# Altium PCB ACH512识别升级仪V1.2_20260608.PcbDoc (part 6 of 6)
Units mil, origin at the board's own origin, x right, y up, seen from the top; angles counter-clockwise.
Board outline 6141.73 x 5401.57 mil, 2 copper layers (Top Layer, Bottom Layer); 157 components, 111 nets, 548 pads, 222 vias.
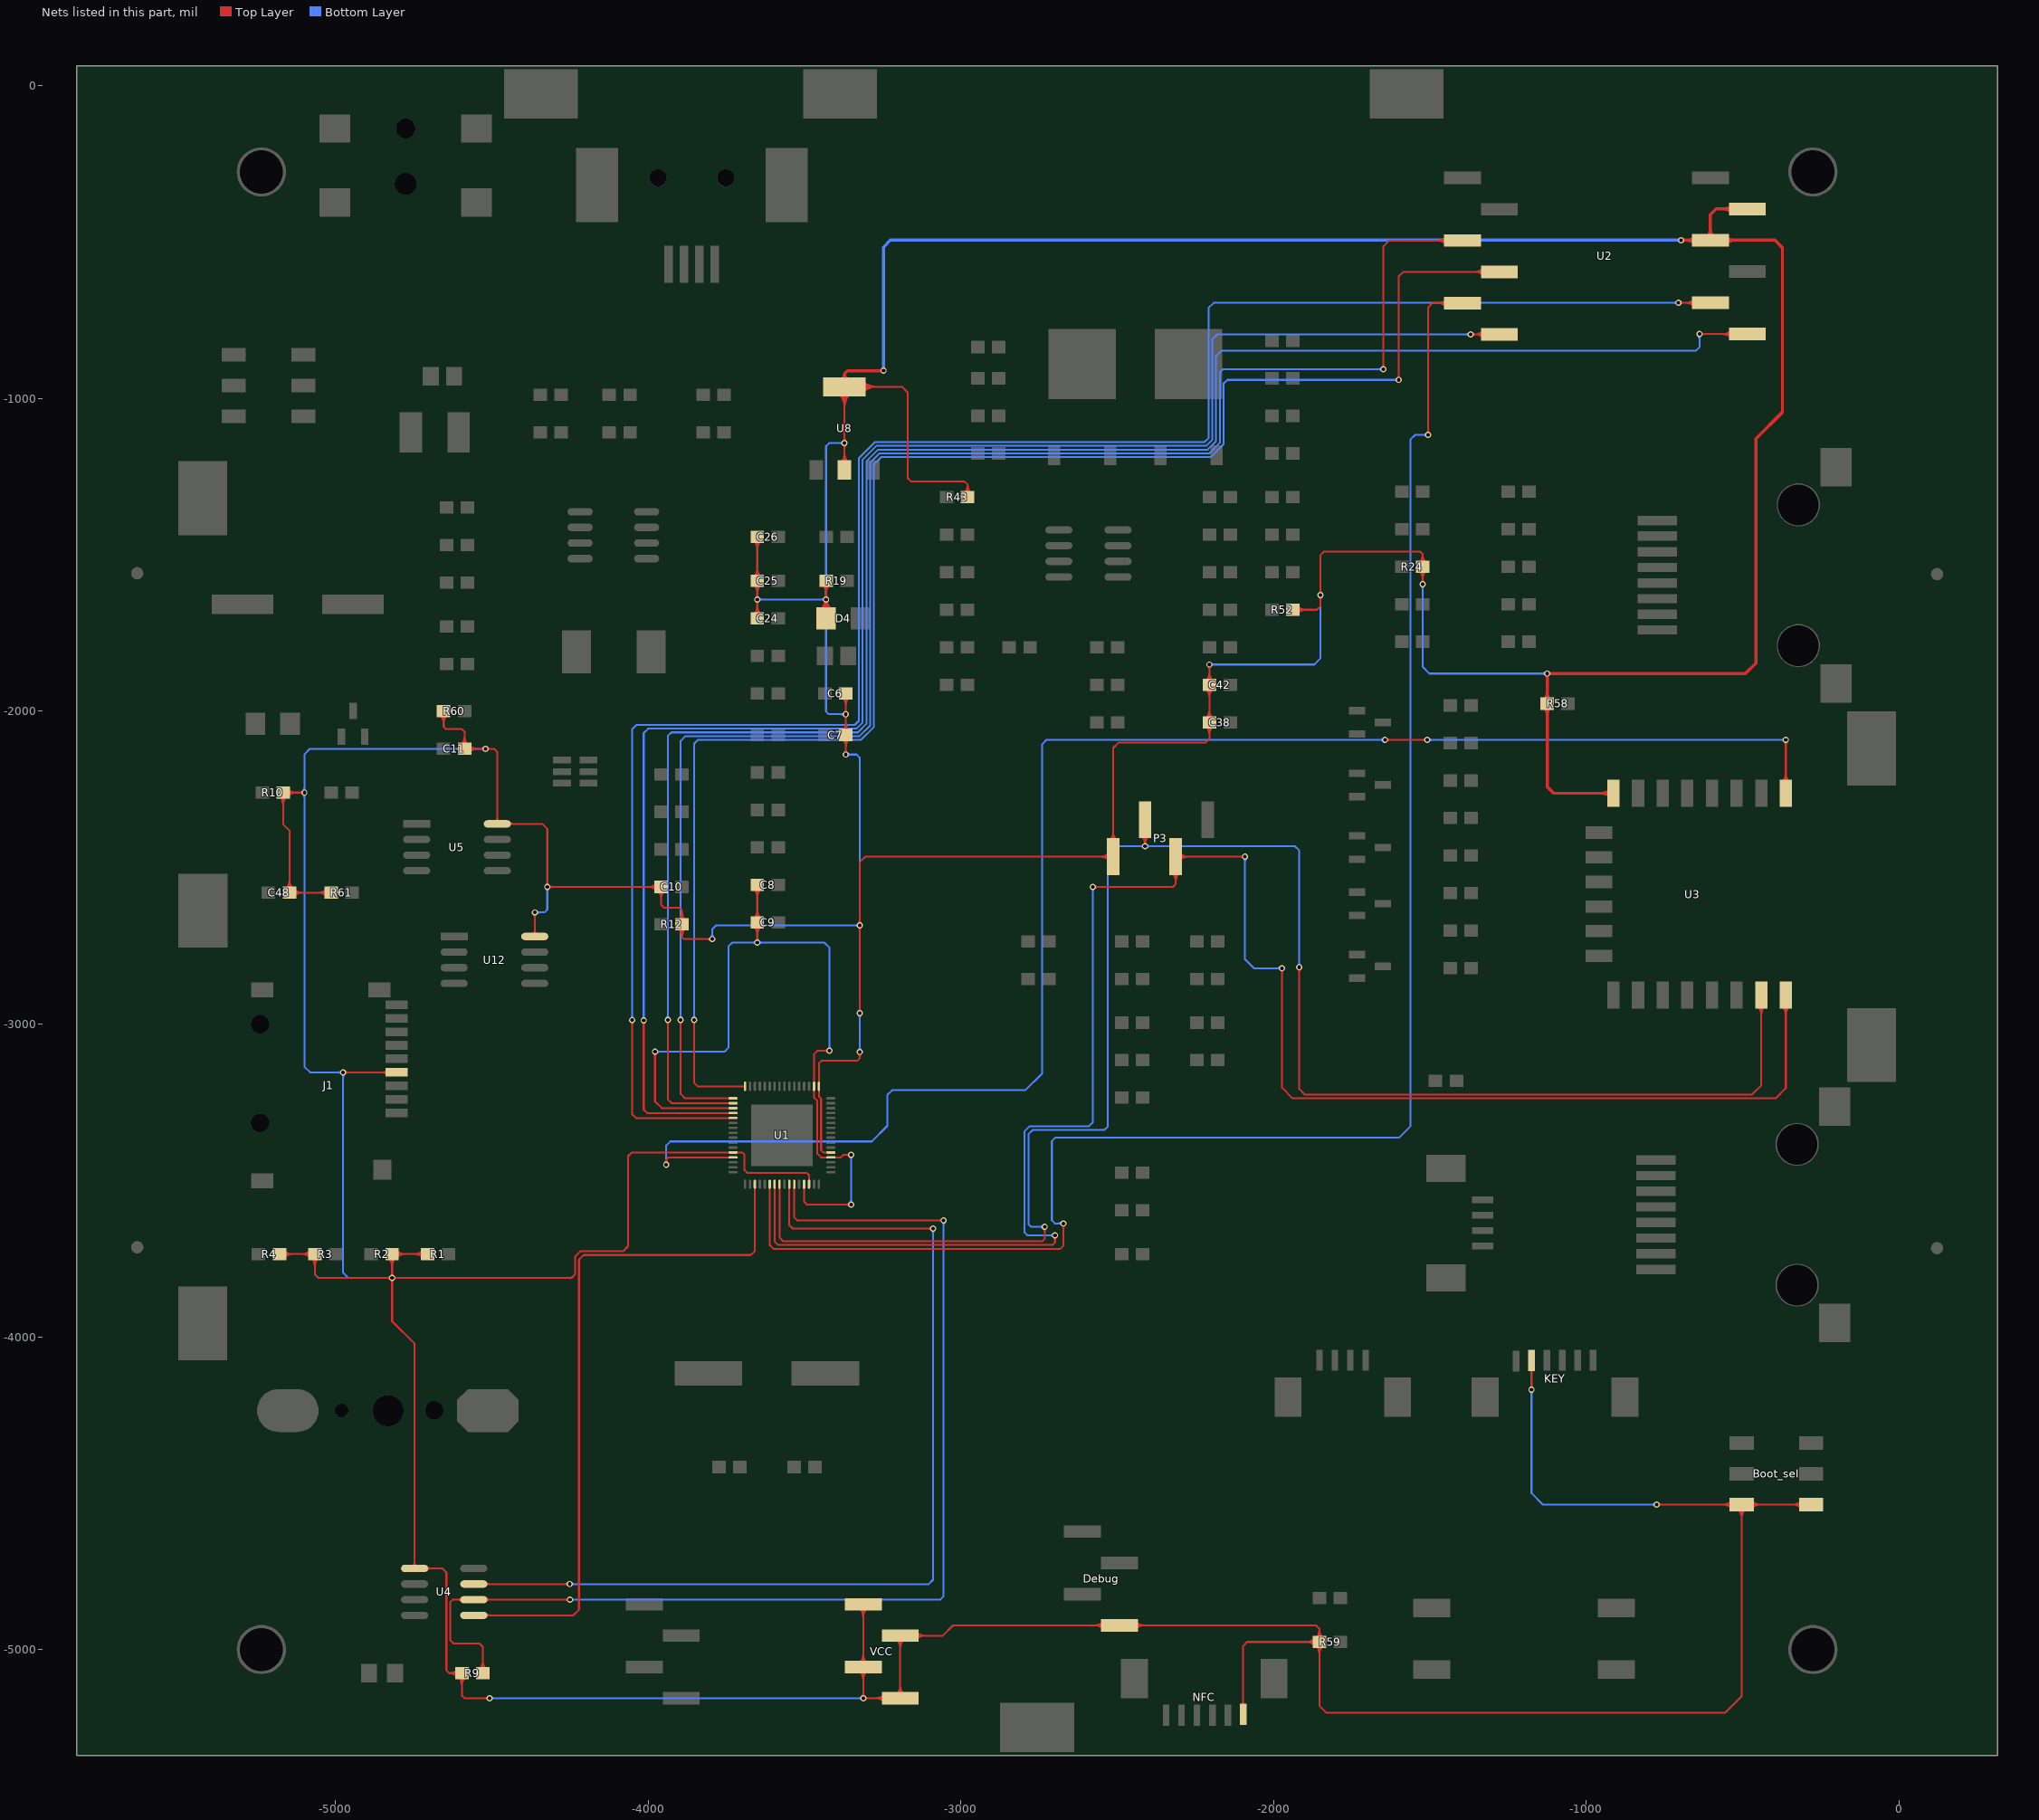
[diagram p6: the nets of this part, all layers, seen from the top]

## Via types
v1: diameter 19.68, hole 11.81, Top Layer to Bottom Layer, 222 vias

## Nets (pads, with @x,y where several pads share a name; then routed paths per layer and width w, separated by ;. In a path a pad name is that pad's centre, name@x,y a point inside that pad or via, vN(x,y) a via of type N, cw(c..) or ccw(c..) an arc to the next point about the centre after c; other vN are vias at no path point) (continued)
PRINT_UARTB_RX: P3.3 U1.23 U3.22 | length 6396.5
  Top Layer w6: U1.23@-3595.43,-3512.09 -3595.43,-3694.97 -3583.81,-3706.59 -2706.81,-3706.59 -2698.81,-3698.59 v1(-2698.81,-3675.59) ; v1@-2703.65,-3680.43 cw(c-2715.33,-3692.11) -2698.81,-3692.11 cw(c-2682.29,-3692.11) v1@-2693.97,-3680.43 ; v1(-2577.81,-2561.59) -2321.81,-2561.59 -2312.81,-2552.59 P3.3@-2312.81,-2465 v1(-2091.22,-2465) ; v1@-2572.97,-2566.43 cw(c-2561.29,-2578.11) -2561.29,-2561.59 cw(c-2561.29,-2545.07) v1@-2572.97,-2556.75 ; P3.3@-2324.89,-2516.05 cw(c-2354.04,-2545.21) -2312.81,-2545.21 cw(c-2271.58,-2545.21) P3.3@-2300.73,-2516.05 ; P3.3@-2320.64,-2511.81 cw(c-2339.56,-2530.72) -2312.81,-2530.72 cw(c-2286.06,-2530.72) P3.3@-2304.98,-2511.81 ; P3.3@-2304.98,-2472.83 cw(c-2286.06,-2491.75) -2286.06,-2465 cw(c-2286.06,-2438.25) P3.3@-2304.98,-2457.17 ; P3.3@-2300.73,-2477.08 cw(c-2271.58,-2506.23) -2271.58,-2465 cw(c-2271.58,-2423.77) P3.3@-2300.73,-2452.92 ; v1@-2096.06,-2469.84 ccw(c-2107.74,-2481.52) -2107.74,-2465 ccw(c-2107.74,-2448.48) v1@-2096.06,-2460.16 ; v1@-1977.65,-2826.43 cw(c-1989.33,-2838.11) -1972.81,-2838.11 cw(c-1956.29,-2838.11) v1@-1967.97,-2826.43 ; v1(-1972.81,-2821.59) -1972.81,-3203.59 -1938.81,-3237.59 -394.81,-3237.59 -362.05,-3204.83 U3.22@-362.05,-2907.87 ; U3.22@-373.84,-2943.29 cw(c-402.33,-2971.78) -362.05,-2971.78 cw(c-321.76,-2971.78) U3.22@-350.25,-2943.29 ; U3.22@-369.6,-2939.05 cw(c-387.84,-2957.29) -362.05,-2957.29 cw(c-336.25,-2957.29) U3.22@-354.49,-2939.05
  Bottom Layer w6: v1@-2703.65,-3680.43 ccw(c-2715.33,-3692.11) -2715.33,-3675.59 ccw(c-2715.33,-3659.07) v1@-2703.65,-3670.75 ; v1(-2698.81,-3675.59) -2786.81,-3675.59 -2795.81,-3666.59 -2795.81,-3342.59 -2779.81,-3326.59 -2589.81,-3326.59 -2577.81,-3314.59 v1(-2577.81,-2561.59) ; v1@-2582.65,-2566.43 cw(c-2594.33,-2578.11) -2577.81,-2578.11 cw(c-2561.29,-2578.11) v1@-2572.97,-2566.43 ; v1@-2096.06,-2469.84 cw(c-2107.74,-2481.52) -2091.22,-2481.52 cw(c-2074.7,-2481.52) v1@-2086.38,-2469.84 ; v1(-2091.22,-2465) -2091.22,-2793.18 -2062.81,-2821.59 v1(-1972.81,-2821.59) ; v1@-1977.65,-2826.43 ccw(c-1989.33,-2838.11) -1989.33,-2821.59 ccw(c-1989.33,-2805.07) v1@-1977.65,-2816.75
PRINT_UARTB_TX: P3.2 U1.24 U3.21 | length 6201.4
  Top Layer w6: U1.24@-3579.68,-3512.09 -3579.68,-3682.72 -3567.81,-3694.59 -2739.81,-3694.59 -2731.81,-3686.59 v1(-2731.81,-3648.59) ; v1@-2736.65,-3653.43 cw(c-2748.33,-3665.11) -2731.81,-3665.11 cw(c-2715.29,-3665.11) v1@-2726.97,-3653.43 ; P3.2@-2422.89,-2398.05 cw(c-2452.04,-2427.21) -2410.81,-2427.21 cw(c-2369.58,-2427.21) P3.2@-2398.73,-2398.05 ; P3.2@-2418.64,-2393.81 cw(c-2437.56,-2412.72) -2410.81,-2412.72 cw(c-2384.06,-2412.72) P3.2@-2402.98,-2393.81 ; v1@-2415.65,-2426.75 ccw(c-2427.33,-2415.07) -2410.81,-2415.07 ccw(c-2394.29,-2415.07) v1@-2405.97,-2426.75 ; v1(-2410.81,-2431.59) P3.2@-2410.81,-2347 ; v1@-1922.65,-2823.43 cw(c-1934.33,-2835.11) -1917.81,-2835.11 cw(c-1901.29,-2835.11) v1@-1912.97,-2823.43 ; v1(-1917.81,-2818.59) -1917.81,-3207.59 -1899.81,-3225.59 -470.81,-3225.59 -440.79,-3195.57 U3.21@-440.79,-2907.87 ; U3.21@-452.58,-2943.29 cw(c-481.07,-2971.78) -440.79,-2971.78 cw(c-400.51,-2971.78) U3.21@-428.99,-2943.29 ; U3.21@-448.34,-2939.05 cw(c-466.58,-2957.29) -440.79,-2957.29 cw(c-414.99,-2957.29) U3.21@-433.23,-2939.05
  Bottom Layer w6: v1@-2736.65,-3653.43 ccw(c-2748.33,-3665.11) -2748.33,-3648.59 ccw(c-2748.33,-3632.07) v1@-2736.65,-3643.75 ; v1(-2731.81,-3648.59) -2774.81,-3648.59 -2783.81,-3639.59 -2783.81,-3352.59 -2769.81,-3338.59 -2540.81,-3338.59 -2529.81,-3327.59 -2529.81,-2444.59 -2516.81,-2431.59 v1(-2410.81,-2431.59) -1931.81,-2431.59 -1917.81,-2445.59 v1(-1917.81,-2818.59) ; v1@-2415.65,-2436.43 ccw(c-2427.33,-2448.11) -2427.33,-2431.59 ccw(c-2427.33,-2415.07) v1@-2415.65,-2426.75 ; v1@-2405.97,-2436.43 cw(c-2394.29,-2448.11) -2394.29,-2431.59 cw(c-2394.29,-2415.07) v1@-2405.97,-2426.75 ; v1@-1922.65,-2813.75 ccw(c-1934.33,-2802.07) -1917.81,-2802.07 ccw(c-1901.29,-2802.07) v1@-1912.97,-2813.75
RTC_CE: U1.19 U4.5 | length 2283.6
  Top Layer w6: U4.5@-4557.32,-4890.59 -4238.81,-4890.59 -4220.81,-4872.59 -4220.81,-3753.59 -4205.81,-3738.59 -3671.81,-3738.59 -3658.42,-3725.2 U1.19@-3658.42,-3512.09 ; U4.5@-4519.6,-4896.82 cw(c-4504.55,-4911.86) -4504.55,-4890.59 cw(c-4504.55,-4869.32) U4.5@-4519.6,-4884.36
RTC_IO: R9.1 U1.27 U4.6 | length 3969.3
  Top Layer w6: U4.6@-4595.05,-4846.82 ccw(c-4610.09,-4861.86) -4610.09,-4840.59 ccw(c-4610.09,-4819.32) U4.6@-4595.05,-4834.36 ; R9.1@-4540.14,-5063.79 ccw(c-4568.63,-5035.31) -4528.35,-5035.31 ccw(c-4488.06,-5035.31) R9.1@-4516.55,-5063.79 ; R9.1@-4535.9,-5068.03 ccw(c-4554.14,-5049.79) -4528.35,-5049.79 ccw(c-4502.55,-5049.79) R9.1@-4520.79,-5068.03 ; R9.1@-4528.35,-5075.59 -4528.35,-4991.05 -4538.81,-4980.59 -4621.81,-4980.59 -4632.81,-4969.59 -4632.81,-4848.59 -4624.81,-4840.59 U4.6@-4557.32,-4840.59 v1(-4249.81,-4840.59) ; U4.6@-4519.6,-4846.82 cw(c-4504.55,-4861.86) -4504.55,-4840.59 cw(c-4504.55,-4819.32) U4.6@-4519.6,-4834.36 ; v1@-4254.65,-4845.43 ccw(c-4266.33,-4857.11) -4266.33,-4840.59 ccw(c-4266.33,-4824.07) v1@-4254.65,-4835.75 ; U1.27@-3532.44,-3512.09 -3532.44,-3618.96 -3523.81,-3627.59 v1(-3054.81,-3627.59) ; v1@-3059.65,-3632.43 ccw(c-3071.33,-3644.11) -3071.33,-3627.59 ccw(c-3071.33,-3611.07) v1@-3059.65,-3622.75
  Bottom Layer w6: v1(-4249.81,-4840.59) -3065.81,-4840.59 -3054.81,-4829.59 v1(-3054.81,-3627.59) ; v1@-4244.97,-4845.43 cw(c-4233.29,-4857.11) -4233.29,-4840.59 cw(c-4233.29,-4824.07) v1@-4244.97,-4835.75 ; v1@-3059.65,-3632.43 cw(c-3071.33,-3644.11) -3054.81,-3644.11 cw(c-3038.29,-3644.11) v1@-3049.97,-3632.43
RTC_SCLK: U1.26 U4.7 | length 3329
  Top Layer w6: U4.7@-4557.32,-4790.59 v1(-4250.81,-4790.59) ; U4.7@-4519.6,-4796.82 cw(c-4504.55,-4811.86) -4504.55,-4790.59 cw(c-4504.55,-4769.32) U4.7@-4519.6,-4784.36 ; v1@-4255.65,-4795.43 ccw(c-4267.33,-4807.11) -4267.33,-4790.59 ccw(c-4267.33,-4774.07) v1@-4255.65,-4785.75 ; U1.26@-3548.19,-3512.09 -3548.19,-3643.21 -3537.31,-3654.09 v1(-3088.81,-3654.09) ; v1@-3093.65,-3658.93 ccw(c-3105.33,-3670.61) -3105.33,-3654.09 ccw(c-3105.33,-3637.57) v1@-3093.65,-3649.25
  Bottom Layer w6: v1(-4250.81,-4790.59) -3102.81,-4790.59 -3088.81,-4776.59 v1(-3088.81,-3654.09) ; v1@-4245.97,-4795.43 cw(c-4234.29,-4807.11) -4234.29,-4790.59 cw(c-4234.29,-4774.07) v1@-4245.97,-4785.75 ; v1@-3093.65,-3658.93 cw(c-3105.33,-3670.61) -3088.81,-3670.61 cw(c-3072.29,-3670.61) v1@-3083.97,-3658.93
VCC: Boot_sel.1 C6.2 C7.2 C10.2 C11.1 C24.1 C25.1 C26.1 C38.2 C42.2 C48.2 D4.1 Debug.1 J1.4 KEY.5 NFC.6 P3.1 R1.2 R2.2 R3.2 R4.2 R9.2 R10.2 R12.1 R19.2 R24.2 R43.2 R52.2 R58.2 R59.1 R60.2 R61.1 U1.12 U1.30 U1.37 U1.49 U2.8 U2.9 U3.8 U4.1 U5.8 U8.2 U8.4 U12.8 VCC.1 VCC.2 VCC.3 VCC.4 | length 40039.5
  Top Layer w6: R4.2@-5178.35,-3735.59 R3.2@-5065.27,-3735.59 -5065.27,-3800.13 -5053.81,-3811.59 v1(-4818.35,-3811.59) ; R10.2@-5178.33,-2271.8 cw(c-5206.82,-2300.28) -5166.54,-2300.28 cw(c-5126.25,-2300.28) R10.2@-5154.74,-2271.8 ; R10.2@-5174.09,-2267.56 cw(c-5192.33,-2285.8) -5166.54,-2285.8 cw(c-5140.74,-2285.8) R10.2@-5158.98,-2267.56 ; R4.2@-5168.82,-3743.15 cw(c-5150.58,-3761.39) -5150.58,-3735.59 cw(c-5150.58,-3709.79) R4.2@-5168.82,-3728.03 ; R4.2@-5164.58,-3747.39 cw(c-5136.1,-3775.87) -5136.1,-3735.59 cw(c-5136.1,-3695.31) R4.2@-5164.58,-3723.79 ; C48.2@-5158.33,-2568.2 ccw(c-5186.82,-2539.72) -5146.54,-2539.72 ccw(c-5106.25,-2539.72) C48.2@-5134.74,-2568.2 ; R10.2@-5157.01,-2267.56 cw(c-5138.77,-2285.8) -5138.77,-2260 cw(c-5138.77,-2234.2) R10.2@-5157.01,-2252.44 ; C48.2@-5154.09,-2572.44 ccw(c-5172.33,-2554.2) -5146.54,-2554.2 ccw(c-5120.74,-2554.2) C48.2@-5138.98,-2572.44 ; R10.2@-5152.77,-2271.8 cw(c-5124.29,-2300.28) -5124.29,-2260 cw(c-5124.29,-2219.72) R10.2@-5152.77,-2248.2 ; C48.2@-5137.01,-2587.56 cw(c-5118.77,-2605.8) -5118.77,-2580 cw(c-5118.77,-2554.2) C48.2@-5137.01,-2572.44 ; C48.2@-5132.77,-2591.8 cw(c-5104.29,-2620.28) -5104.29,-2580 cw(c-5104.29,-2539.72) C48.2@-5132.77,-2568.2 ; v1@-5103.65,-2264.84 ccw(c-5115.33,-2276.52) -5115.33,-2260 ccw(c-5115.33,-2243.48) v1@-5103.65,-2255.16 ; v1(-5098.81,-2260) R10.2@-5166.54,-2260 -5166.54,-2361.46 -5146.54,-2381.46 C48.2@-5146.54,-2580 R61.1@-5013.46,-2580 ; R3.2@-5079.04,-3747.39 ccw(c-5107.52,-3775.87) -5107.52,-3735.59 ccw(c-5107.52,-3695.31) R3.2@-5079.04,-3723.79 ; R3.2@-5077.07,-3747.39 cw(c-5105.56,-3775.87) -5065.27,-3775.87 cw(c-5024.99,-3775.87) R3.2@-5053.48,-3747.39 ; R3.2@-5074.8,-3743.15 ccw(c-5093.04,-3761.39) -5093.04,-3735.59 ccw(c-5093.04,-3709.79) R3.2@-5074.8,-3728.03 ; R3.2@-5072.83,-3743.15 cw(c-5091.07,-3761.39) -5065.27,-3761.39 cw(c-5039.48,-3761.39) R3.2@-5057.72,-3743.15 ; R61.1@-5027.23,-2591.8 ccw(c-5055.71,-2620.28) -5055.71,-2580 ccw(c-5055.71,-2539.72) R61.1@-5027.23,-2568.2 ; R61.1@-5022.99,-2587.56 ccw(c-5041.23,-2605.8) -5041.23,-2580 ccw(c-5041.23,-2554.2) R61.1@-5022.99,-2572.44 ; v1(-4974.73,-3154.67) J1.4@-4804.24,-3154.67 ; v1@-4969.89,-3159.51 cw(c-4958.21,-3171.19) -4958.21,-3154.67 cw(c-4958.21,-3138.15) v1@-4969.89,-3149.83 ; J1.4@-4833.52,-3162.29 ccw(c-4851.92,-3180.7) -4851.92,-3154.67 ccw(c-4851.92,-3128.64) J1.4@-4833.52,-3147.05 ; R2.2@-4830.14,-3747.39 cw(c-4858.63,-3775.87) -4818.35,-3775.87 cw(c-4778.06,-3775.87) R2.2@-4806.55,-3747.39 ; R2.2@-4825.9,-3743.15 cw(c-4844.14,-3761.39) -4818.35,-3761.39 cw(c-4792.55,-3761.39) R2.2@-4810.79,-3743.15 ; R2.2@-4808.82,-3743.15 cw(c-4790.58,-3761.39) -4790.58,-3735.59 cw(c-4790.58,-3709.79) R2.2@-4808.82,-3728.03 ; R2.2@-4804.58,-3747.39 cw(c-4776.1,-3775.87) -4776.1,-3735.59 cw(c-4776.1,-3695.31) R2.2@-4804.58,-3723.79 ; U4.1@-4752.53,-4734.36 ccw(c-4767.57,-4719.32) -4746.3,-4719.32 ccw(c-4725.03,-4719.32) U4.1@-4740.07,-4734.36 ; R1.2@-4719.04,-3747.39 ccw(c-4747.52,-3775.87) -4747.52,-3735.59 ccw(c-4747.52,-3695.31) R1.2@-4719.04,-3723.79 ; R1.2@-4714.8,-3743.15 ccw(c-4733.04,-3761.39) -4733.04,-3735.59 ccw(c-4733.04,-3709.79) R1.2@-4714.8,-3728.03 ; U4.1@-4708.57,-4746.82 cw(c-4693.53,-4761.86) -4693.53,-4740.59 cw(c-4693.53,-4719.32) U4.1@-4708.57,-4734.36 ; R1.2@-4705.27,-3735.59 R2.2@-4818.35,-3735.59 v1(-4818.35,-3811.59) ; R60.2@-4665.26,-2011.8 cw(c-4693.75,-2040.28) -4653.46,-2040.28 cw(c-4613.18,-2040.28) R60.2@-4641.67,-2011.8 ; R60.2@-4661.02,-2007.56 cw(c-4679.26,-2025.8) -4653.46,-2025.8 cw(c-4627.67,-2025.8) R60.2@-4645.91,-2007.56 ; R60.2@-4653.46,-2000 -4653.46,-2049.54 -4646,-2057 -4595,-2057 -4586.54,-2065.46 C11.1@-4586.54,-2120 v1(-4519.35,-2120) -4492,-2120 -4482.13,-2129.87 U5.8@-4482.13,-2360 -4338,-2360 -4322,-2376 v1(-4322,-2561.59) C10.2@-3958.27,-2561.59 -3958.27,-2619.13 -3948.81,-2628.59 -3899.81,-2628.59 -3891.35,-2637.05 R12.1@-3891.35,-2681.59 -3891.35,-2723.05 -3885.81,-2728.59 v1(-3794.81,-2728.59) ; R9.2@-4609.4,-5087.01 ccw(c-4635.81,-5111.82) -4635.81,-5075.59 ; R9.2@-4609.4,-5064.17 cw(c-4635.81,-5039.36) -4635.81,-5075.59 ; R9.2@-4607.07,-5087.39 cw(c-4635.56,-5115.87) -4595.27,-5115.87 cw(c-4554.99,-5115.87) R9.2@-4583.48,-5087.39 ; R9.2@-4605.03,-5082.91 ccw(c-4621.94,-5098.79) -4621.94,-5075.59 ccw(c-4621.94,-5052.39) R9.2@-4605.03,-5068.27 ; R9.2@-4602.83,-5083.15 cw(c-4621.07,-5101.39) -4595.27,-5101.39 cw(c-4569.48,-5101.39) R9.2@-4587.72,-5083.15 ; C11.1@-4598.33,-2108.2 ccw(c-4626.82,-2079.72) -4586.54,-2079.72 ccw(c-4546.25,-2079.72) C11.1@-4574.74,-2108.2 ; C11.1@-4594.09,-2112.44 ccw(c-4612.33,-2094.2) -4586.54,-2094.2 ccw(c-4560.74,-2094.2) C11.1@-4578.98,-2112.44 ; C11.1@-4577.01,-2127.56 cw(c-4558.77,-2145.8) -4558.77,-2120 cw(c-4558.77,-2094.2) C11.1@-4577.01,-2112.44 ; C11.1@-4572.77,-2131.8 cw(c-4544.29,-2160.28) -4544.29,-2120 cw(c-4544.29,-2079.72) C11.1@-4572.77,-2108.2 ; v1@-4524.18,-2124.84 ccw(c-4535.86,-2136.52) -4535.86,-2120 ccw(c-4535.86,-2103.48) v1@-4524.18,-2115.16 ; v1@-4514.51,-2124.84 cw(c-4502.83,-2136.52) -4502.83,-2120 cw(c-4502.83,-2103.48) v1@-4514.51,-2115.16 ; v1@-4511.65,-5160.43 ccw(c-4523.33,-5172.11) -4523.33,-5155.59 ccw(c-4523.33,-5139.07) v1@-4511.65,-5150.75 ; v1(-4506.81,-5155.59) -4586.81,-5155.59 -4595.27,-5147.13 R9.2@-4595.27,-5075.59 -4635.81,-5075.59 ; U5.8@-4488.36,-2353.77 ccw(c-4503.4,-2338.73) -4482.13,-2338.73 ccw(c-4460.85,-2338.73) U5.8@-4475.9,-2353.77 ; U5.8@-4444.4,-2366.23 cw(c-4429.36,-2381.27) -4429.36,-2360 cw(c-4429.36,-2338.73) U5.8@-4444.4,-2353.77 ; U12.8@-4368.36,-2713.77 ccw(c-4383.4,-2698.73) -4362.13,-2698.73 ccw(c-4340.85,-2698.73) U12.8@-4355.9,-2713.77 ; v1@-4366.96,-2647.96 cw(c-4378.65,-2659.65) -4362.13,-2659.65 cw(c-4345.61,-2659.65) v1@-4357.29,-2647.96 ; U12.8@-4362.13,-2720 v1(-4362.13,-2643.13) ; v1@-4326.84,-2556.75 ccw(c-4338.52,-2545.07) -4322,-2545.07 ccw(c-4305.48,-2545.07) -4317.16,-2556.75 ccw(c-4305.48,-2545.07) -4305.48,-2561.59 ccw(c-4305.48,-2578.11) v1@-4317.16,-2566.43 ; C10.2@-3972.04,-2573.39 ccw(c-4000.52,-2601.87) -4000.52,-2561.59 ccw(c-4000.52,-2521.31) C10.2@-3972.04,-2549.79 ; C10.2@-3970.07,-2573.39 cw(c-3998.56,-2601.87) -3958.27,-2601.87 cw(c-3917.99,-2601.87) C10.2@-3946.48,-2573.39 ; C10.2@-3967.8,-2569.15 ccw(c-3986.04,-2587.39) -3986.04,-2561.59 ccw(c-3986.04,-2535.79) C10.2@-3967.8,-2554.03 ; C10.2@-3965.83,-2569.15 cw(c-3984.07,-2587.39) -3958.27,-2587.39 cw(c-3932.48,-2587.39) C10.2@-3950.72,-2569.15 ; R12.1@-3903.14,-2693.39 cw(c-3931.63,-2721.87) -3891.35,-2721.87 cw(c-3851.06,-2721.87) R12.1@-3879.55,-2693.39 ; R12.1@-3903.14,-2669.79 ccw(c-3931.63,-2641.31) -3891.35,-2641.31 ccw(c-3851.06,-2641.31) R12.1@-3879.55,-2669.79 ; R12.1@-3898.9,-2689.15 cw(c-3917.14,-2707.39) -3891.35,-2707.39 cw(c-3865.55,-2707.39) R12.1@-3883.79,-2689.15 ; R12.1@-3898.9,-2674.03 ccw(c-3917.14,-2655.79) -3891.35,-2655.79 ccw(c-3865.55,-2655.79) R12.1@-3883.79,-2674.03 ; v1@-3799.65,-2733.43 ccw(c-3811.33,-2745.11) -3811.33,-2728.59 ccw(c-3811.33,-2712.07) v1@-3799.65,-2723.75 ; C24.1@-3662.54,-1690.79 ccw(c-3691.02,-1662.31) -3650.74,-1662.31 ccw(c-3610.46,-1662.31) C24.1@-3638.94,-1690.79 ; C25.1@-3662.54,-1594.39 cw(c-3691.02,-1622.87) -3650.74,-1622.87 cw(c-3610.46,-1622.87) C25.1@-3638.94,-1594.39 ; C25.1@-3662.54,-1570.79 ccw(c-3691.02,-1542.31) -3650.74,-1542.31 ccw(c-3610.46,-1542.31) C25.1@-3638.94,-1570.79 ; C26.1@-3662.54,-1454.39 cw(c-3691.02,-1482.87) -3650.74,-1482.87 cw(c-3610.46,-1482.87) C26.1@-3638.94,-1454.39 ; C24.1@-3658.29,-1695.03 ccw(c-3676.53,-1676.79) -3650.74,-1676.79 ccw(c-3624.94,-1676.79) C24.1@-3643.18,-1695.03 ; C25.1@-3658.29,-1590.15 cw(c-3676.53,-1608.39) -3650.74,-1608.39 cw(c-3624.94,-1608.39) C25.1@-3643.18,-1590.15 ; C25.1@-3658.29,-1575.03 ccw(c-3676.53,-1556.79) -3650.74,-1556.79 ccw(c-3624.94,-1556.79) C25.1@-3643.18,-1575.03 ; C26.1@-3658.29,-1450.15 cw(c-3676.53,-1468.39) -3650.74,-1468.39 cw(c-3624.94,-1468.39) C26.1@-3643.18,-1450.15 ; v1@-3655.58,-1647.43 cw(c-3667.26,-1659.11) -3650.74,-1659.11 cw(c-3634.22,-1659.11) v1@-3645.9,-1647.43 ; v1@-3655.58,-1637.75 ccw(c-3667.26,-1626.07) -3650.74,-1626.07 ccw(c-3634.22,-1626.07) v1@-3645.9,-1637.75 ; C24.1@-3650.74,-1702.59 v1(-3650.74,-1642.59) C25.1@-3650.74,-1582.59 C26.1@-3650.74,-1442.59 ; U1.30@-3485.2,-3512.09 -3485.2,-3483.2 -3492.81,-3475.59 -3682.81,-3475.59 -3691.81,-3466.59 -3691.81,-3417.59 -3698.69,-3410.71 U1.12@-3728.31,-3410.71 -4051.93,-3410.71 -4063.81,-3422.59 -4063.81,-3710.59 -4079.81,-3726.59 -4216.81,-3726.59 -4232.81,-3742.59 -4232.81,-3799.59 -4244.81,-3811.59 v1(-4818.35,-3811.59) ; D4.1@-3450.89,-1678.5 ccw(c-3499.53,-1629.86) -3430.74,-1629.86 ccw(c-3361.94,-1629.86) D4.1@-3410.59,-1678.5 ; D4.1@-3446.65,-1682.75 ccw(c-3485.05,-1644.34) -3430.74,-1644.34 ccw(c-3376.43,-1644.34) D4.1@-3414.83,-1682.75 ; R19.2@-3442.54,-1594.39 cw(c-3471.02,-1622.87) -3430.74,-1622.87 cw(c-3390.46,-1622.87) R19.2@-3418.94,-1594.39 ; D4.1@-3442.4,-1686.99 ccw(c-3470.56,-1658.83) -3430.74,-1658.83 ccw(c-3390.91,-1658.83) D4.1@-3419.07,-1686.99 ; R19.2@-3438.29,-1590.15 cw(c-3456.54,-1608.39) -3430.74,-1608.39 cw(c-3404.94,-1608.39) R19.2@-3423.18,-1590.15 ; v1@-3435.58,-1647.43 cw(c-3447.26,-1659.11) -3430.74,-1659.11 cw(c-3414.22,-1659.11) v1@-3425.9,-1647.43 ; v1@-3435.58,-1637.75 ccw(c-3447.26,-1626.07) -3430.74,-1626.07 ccw(c-3414.22,-1626.07) v1@-3425.9,-1637.75 ; D4.1@-3430.74,-1702.59 R19.2@-3430.74,-1582.59 ; U1.37@-3415.31,-3410.71 -3439.69,-3410.71 -3446.81,-3403.59 -3446.81,-3238.59 -3453.81,-3231.59 -3453.81,-3199.2 U1.49@-3453.7,-3199.09 -3453.7,-3125.48 -3445.81,-3117.59 -3330.81,-3117.59 -3323.22,-3110 v1(-3323.22,-3089.18) ; U8.4@-3391.26,-982.17 cw(c-3438.23,-1029.14) -3371.81,-1029.14 cw(c-3305.39,-1029.14) U8.4@-3352.36,-982.17 ; U8.4@-3387.02,-977.93 cw(c-3423.74,-1014.65) -3371.81,-1014.65 cw(c-3319.88,-1014.65) U8.4@-3356.6,-977.93 ; U8.2@-3385,-1206.42 ccw(c-3416.84,-1174.57) -3371.81,-1174.57 ccw(c-3326.78,-1174.57) U8.2@-3358.62,-1206.42 ; U8.4@-3382.78,-973.68 cw(c-3409.26,-1000.16) -3371.81,-1000.16 cw(c-3334.36,-1000.16) U8.4@-3360.84,-973.68 ; U8.2@-3380.76,-1210.66 ccw(c-3402.36,-1189.06) -3371.81,-1189.06 ccw(c-3341.26,-1189.06) U8.2@-3362.86,-1210.66 ; C7.2@-3379.54,-2087.39 cw(c-3408.03,-2115.87) -3367.75,-2115.87 cw(c-3327.46,-2115.87) C7.2@-3355.95,-2087.39 ; C7.2@-3379.54,-2063.79 ccw(c-3408.03,-2035.31) -3367.75,-2035.31 ccw(c-3327.46,-2035.31) C7.2@-3355.95,-2063.79 ; C6.2@-3379.54,-1954.39 cw(c-3408.03,-1982.87) -3367.75,-1982.87 cw(c-3327.46,-1982.87) C6.2@-3355.95,-1954.39 ; v1@-3376.65,-1147.43 cw(c-3388.33,-1159.11) -3371.81,-1159.11 cw(c-3355.29,-1159.11) v1@-3366.97,-1147.43 ; v1@-3376.65,-1137.75 ccw(c-3388.33,-1126.07) -3371.81,-1126.07 ccw(c-3355.29,-1126.07) v1@-3366.97,-1137.75 ; C7.2@-3375.3,-2083.15 cw(c-3393.54,-2101.39) -3367.75,-2101.39 cw(c-3341.95,-2101.39) C7.2@-3360.19,-2083.15 ; C7.2@-3375.3,-2068.03 ccw(c-3393.54,-2049.79) -3367.75,-2049.79 ccw(c-3341.95,-2049.79) C7.2@-3360.19,-2068.03 ; C6.2@-3375.3,-1950.15 cw(c-3393.54,-1968.39) -3367.75,-1968.39 cw(c-3341.95,-1968.39) C6.2@-3360.19,-1950.15 ; v1@-3372.58,-2133.69 ccw(c-3384.26,-2122.01) -3367.75,-2122.01 ccw(c-3351.23,-2122.01) v1@-3362.91,-2133.69 ; v1@-3372.58,-2014.43 cw(c-3384.26,-2026.11) -3367.75,-2026.11 cw(c-3351.23,-2026.11) v1@-3362.91,-2014.43 ; v1@-3372.58,-2004.75 ccw(c-3384.26,-1993.07) -3367.75,-1993.07 ccw(c-3351.23,-1993.07) v1@-3362.91,-2004.75 ; U8.2@-3371.81,-1228.46 v1(-3371.81,-1142.59) U8.4@-3371.81,-962.72 -3187.68,-962.72 -3169.81,-980.59 -3169.81,-1254.59 -3158.81,-1265.59 -2987.81,-1265.59 -2978.35,-1275.05 R43.2@-2978.35,-1315.59 ; v1(-3367.75,-2138.53) C7.2@-3367.75,-2075.59 v1(-3367.75,-2009.59) C6.2@-3367.75,-1942.59 ; v1@-3328.06,-3094.02 cw(c-3339.74,-3105.7) -3323.22,-3105.7 cw(c-3306.7,-3105.7) v1@-3318.38,-3094.02 ; v1@-3328.06,-2960.16 ccw(c-3339.74,-2948.48) -3323.22,-2948.48 ccw(c-3306.7,-2948.48) v1@-3318.38,-2960.16 ; v1@-3328.06,-2689.43 cw(c-3339.74,-2701.11) -3323.22,-2701.11 cw(c-3306.7,-2701.11) v1@-3318.38,-2689.43 ; v1@-3328.06,-2679.75 ccw(c-3339.74,-2668.07) -3323.22,-2668.07 ccw(c-3306.7,-2668.07) v1@-3318.38,-2679.75 ; VCC.3@-3323.89,-5067.67 cw(c-3353.04,-5096.82) -3311.81,-5096.82 cw(c-3270.58,-5096.82) VCC.3@-3299.73,-5067.67 ; VCC.3@-3323.89,-5043.51 ccw(c-3353.04,-5014.36) -3311.81,-5014.36 ccw(c-3270.58,-5014.36) VCC.3@-3299.73,-5043.51 ; VCC.1@-3323.89,-4867.67 cw(c-3353.04,-4896.82) -3311.81,-4896.82 cw(c-3270.58,-4896.82) VCC.1@-3299.73,-4867.67 ; U8.4@-3323.44,-973.68 cw(c-3296.96,-1000.16) -3296.96,-962.72 cw(c-3296.96,-925.27) U8.4@-3323.44,-951.75 ; v1(-3323.22,-2965) v1(-3323.22,-2684.59) -3323.22,-2482.41 -3305.81,-2465 P3.1@-2512.81,-2465 -2512.81,-2117.59 -2494.81,-2099.59 -2216.81,-2099.59 -2205.27,-2088.05 C38.2@-2205.27,-2035.59 C42.2@-2205.27,-1915.59 v1(-2205.27,-1850.59) ; VCC.3@-3319.64,-5063.42 cw(c-3338.56,-5082.34) -3311.81,-5082.34 cw(c-3285.06,-5082.34) VCC.3@-3303.98,-5063.42 ; VCC.3@-3319.64,-5047.76 ccw(c-3338.56,-5028.84) -3311.81,-5028.84 ccw(c-3285.06,-5028.84) VCC.3@-3303.98,-5047.76 ; VCC.1@-3319.64,-4863.42 cw(c-3338.56,-4882.34) -3311.81,-4882.34 cw(c-3285.06,-4882.34) VCC.1@-3303.98,-4863.42 ; U8.4@-3319.2,-977.93 cw(c-3282.47,-1014.65) -3282.47,-962.72 cw(c-3282.47,-910.78) U8.4@-3319.2,-947.5 ; v1@-3316.65,-5150.75 ccw(c-3328.33,-5139.07) -3311.81,-5139.07 ccw(c-3295.29,-5139.07) -3306.97,-5150.75 ccw(c-3295.29,-5139.07) -3295.29,-5155.59 ccw(c-3295.29,-5172.11) v1@-3306.97,-5160.43 ; U8.4@-3314.95,-982.17 cw(c-3267.99,-1029.14) -3267.99,-962.72 cw(c-3267.99,-896.3) U8.4@-3314.95,-943.26 ; VCC.1@-3311.81,-4855.59 VCC.3@-3311.81,-5055.59 v1(-3311.81,-5155.59) VCC.4@-3193.7,-5155.59 VCC.2@-3193.7,-4955.59 -3057.81,-4955.59 -3024.94,-4922.72 Debug.1@-2492.81,-4922.72 -1864.28,-4922.72 -1853.27,-4933.73 R59.1@-1853.27,-4975.59 ; VCC.4@-3244.75,-5167.67 ccw(c-3273.91,-5196.82) -3273.91,-5155.59 ccw(c-3273.91,-5114.36) VCC.4@-3244.75,-5143.51 ; VCC.4@-3240.51,-5163.42 ccw(c-3259.42,-5182.34) -3259.42,-5155.59 ccw(c-3259.42,-5128.84) VCC.4@-3240.51,-5147.76 ; VCC.4@-3205.78,-5143.51 ccw(c-3234.93,-5114.36) -3193.7,-5114.36 ccw(c-3152.47,-5114.36) VCC.4@-3181.62,-5143.51 ; VCC.2@-3205.78,-4967.67 cw(c-3234.93,-4996.82) -3193.7,-4996.82 cw(c-3152.47,-4996.82) VCC.2@-3181.62,-4967.67 ; VCC.4@-3201.53,-5147.76 ccw(c-3220.45,-5128.84) -3193.7,-5128.84 ccw(c-3166.95,-5128.84) VCC.4@-3185.87,-5147.76 ; VCC.2@-3201.53,-4963.42 cw(c-3220.45,-4982.34) -3193.7,-4982.34 cw(c-3166.95,-4982.34) VCC.2@-3185.87,-4963.42 ; VCC.2@-3146.89,-4963.42 cw(c-3127.98,-4982.34) -3127.98,-4955.59 cw(c-3127.98,-4928.84) VCC.2@-3146.89,-4947.76 ; VCC.2@-3142.65,-4967.67 cw(c-3113.49,-4996.82) -3113.49,-4955.59 cw(c-3113.49,-4914.36) VCC.2@-3142.65,-4943.51 ; R43.2@-2990.14,-1303.79 ccw(c-3018.63,-1275.31) -2978.35,-1275.31 ccw(c-2938.06,-1275.31) R43.2@-2966.55,-1303.79 ; R43.2@-2985.9,-1308.03 ccw(c-3004.14,-1289.79) -2978.35,-1289.79 ccw(c-2952.55,-1289.79) R43.2@-2970.79,-1308.03 ; Debug.1@-2543.86,-4934.79 ccw(c-2573.02,-4963.95) -2573.02,-4922.72 ccw(c-2573.02,-4881.48) Debug.1@-2543.86,-4910.64 ; Debug.1@-2539.62,-4930.55 ccw(c-2558.53,-4949.46) -2558.53,-4922.72 ccw(c-2558.53,-4895.97) Debug.1@-2539.62,-4914.88 ; P3.1@-2524.89,-2477.08 ccw(c-2554.04,-2506.23) -2554.04,-2465 ccw(c-2554.04,-2423.77) P3.1@-2524.89,-2452.92 ; P3.1@-2524.89,-2413.95 ccw(c-2554.04,-2384.79) -2512.81,-2384.79 ccw(c-2471.58,-2384.79) P3.1@-2500.73,-2413.95 ; P3.1@-2520.64,-2472.83 ccw(c-2539.56,-2491.75) -2539.56,-2465 ccw(c-2539.56,-2438.25) P3.1@-2520.64,-2457.17 ; P3.1@-2520.64,-2418.19 ccw(c-2539.56,-2399.28) -2512.81,-2399.28 ccw(c-2486.06,-2399.28) P3.1@-2504.98,-2418.19 ; Debug.1@-2446,-4930.55 cw(c-2427.09,-4949.46) -2427.09,-4922.72 cw(c-2427.09,-4895.97) Debug.1@-2446,-4914.88 ; Debug.1@-2441.76,-4934.79 cw(c-2412.6,-4963.95) -2412.6,-4922.72 cw(c-2412.6,-4881.48) Debug.1@-2441.76,-4910.64 ; C38.2@-2217.07,-2047.39 cw(c-2245.56,-2075.87) -2205.27,-2075.87 cw(c-2164.99,-2075.87) C38.2@-2193.48,-2047.39 ; C38.2@-2217.07,-2023.79 ccw(c-2245.56,-1995.31) -2205.27,-1995.31 ccw(c-2164.99,-1995.31) C38.2@-2193.48,-2023.79 ; C42.2@-2217.07,-1927.39 cw(c-2245.56,-1955.87) -2205.27,-1955.87 cw(c-2164.99,-1955.87) C42.2@-2193.48,-1927.39 ; C42.2@-2217.07,-1903.79 ccw(c-2245.56,-1875.31) -2205.27,-1875.31 ccw(c-2164.99,-1875.31) C42.2@-2193.48,-1903.79 ; C38.2@-2212.83,-2043.15 cw(c-2231.07,-2061.39) -2205.27,-2061.39 cw(c-2179.48,-2061.39) C38.2@-2197.72,-2043.15 ; C38.2@-2212.83,-2028.03 ccw(c-2231.07,-2009.79) -2205.27,-2009.79 ccw(c-2179.48,-2009.79) C38.2@-2197.72,-2028.03 ; C42.2@-2212.83,-1923.15 cw(c-2231.07,-1941.39) -2205.27,-1941.39 cw(c-2179.48,-1941.39) C42.2@-2197.72,-1923.15 ; C42.2@-2212.83,-1908.03 ccw(c-2231.07,-1889.79) -2205.27,-1889.79 ccw(c-2179.48,-1889.79) C42.2@-2197.72,-1908.03 ; v1@-2210.11,-1855.43 cw(c-2221.79,-1867.11) -2205.27,-1867.11 cw(c-2188.76,-1867.11) v1@-2200.44,-1855.43 ; NFC.6@-2102.72,-5179 ccw(c-2115.74,-5165.98) -2097.32,-5165.98 ccw(c-2078.9,-5165.98) NFC.6@-2091.93,-5179 ; NFC.6@-2097.32,-5207.23 -2097.32,-4988.32 -2084.59,-4975.59 R59.1@-1853.27,-4975.59 ; R52.2@-1938.35,-1675.59 -1861.81,-1675.59 -1849.81,-1663.59 v1(-1849.81,-1628.59) -1849.81,-1500.59 -1838.81,-1489.59 -1530.81,-1489.59 -1523.35,-1497.05 R24.2@-1523.35,-1537.59 v1(-1523.35,-1594.13) ; R52.2@-1928.82,-1683.15 cw(c-1910.58,-1701.39) -1910.58,-1675.59 cw(c-1910.58,-1649.79) R52.2@-1928.82,-1668.03 ; R52.2@-1924.58,-1687.39 cw(c-1896.1,-1715.87) -1896.1,-1675.59 cw(c-1896.1,-1635.31) R52.2@-1924.58,-1663.79 ; R59.1@-1867.04,-4987.39 ccw(c-1895.52,-5015.87) -1895.52,-4975.59 ccw(c-1895.52,-4935.31) R59.1@-1867.04,-4963.79 ; R59.1@-1865.07,-4987.39 cw(c-1893.56,-5015.87) -1853.27,-5015.87 cw(c-1812.99,-5015.87) R59.1@-1841.48,-4987.39 ; R59.1@-1865.07,-4963.79 ccw(c-1893.56,-4935.31) -1853.27,-4935.31 ccw(c-1812.99,-4935.31) R59.1@-1841.48,-4963.79 ; R59.1@-1862.8,-4983.15 ccw(c-1881.04,-5001.39) -1881.04,-4975.59 ccw(c-1881.04,-4949.79) R59.1@-1862.8,-4968.03 ; R59.1@-1860.83,-4983.15 cw(c-1879.07,-5001.39) -1853.27,-5001.39 cw(c-1827.48,-5001.39) R59.1@-1845.72,-4983.15 ; R59.1@-1860.83,-4968.03 ccw(c-1879.07,-4949.79) -1853.27,-4949.79 ccw(c-1827.48,-4949.79) R59.1@-1845.72,-4968.03 ; v1@-1854.65,-1633.43 cw(c-1866.33,-1645.11) -1849.81,-1645.11 cw(c-1833.29,-1645.11) v1@-1844.97,-1633.43 ; v1@-1854.65,-1623.75 ccw(c-1866.33,-1612.07) -1849.81,-1612.07 ccw(c-1833.29,-1612.07) v1@-1844.97,-1623.75 ; R24.2@-1535.14,-1549.39 cw(c-1563.63,-1577.87) -1523.35,-1577.87 cw(c-1483.06,-1577.87) R24.2@-1511.55,-1549.39 ; R24.2@-1535.14,-1525.79 ccw(c-1563.63,-1497.31) -1523.35,-1497.31 ccw(c-1483.06,-1497.31) R24.2@-1511.55,-1525.79 ; R24.2@-1530.9,-1545.15 cw(c-1549.14,-1563.39) -1523.35,-1563.39 cw(c-1497.55,-1563.39) R24.2@-1515.79,-1545.15 ; R24.2@-1530.9,-1530.03 ccw(c-1549.14,-1511.79) -1523.35,-1511.79 ccw(c-1497.55,-1511.79) R24.2@-1515.79,-1530.03 ; v1@-1528.18,-1589.29 ccw(c-1539.86,-1577.61) -1523.35,-1577.61 ccw(c-1506.83,-1577.61) v1@-1518.51,-1589.29 ; KEY.5@-1180.67,-4103.82 cw(c-1193.69,-4116.84) -1175.27,-4116.84 cw(c-1156.85,-4116.84) KEY.5@-1169.88,-4103.82 ; v1@-1180.11,-4164.22 ccw(c-1191.79,-4152.53) -1175.27,-4152.53 ccw(c-1158.75,-4152.53) v1@-1170.44,-4164.22 ; v1(-1175.27,-4169.05) KEY.5@-1175.27,-4075.59 ; v1(-775,-4536.59) Boot_sel.1@-503.25,-4536.59 ; v1@-770.16,-4541.43 cw(c-758.48,-4553.11) -758.48,-4536.59 cw(c-758.48,-4520.07) v1@-770.16,-4531.75 ; Boot_sel.1@-533.17,-4549.78 ccw(c-565.02,-4581.62) -565.02,-4536.59 ccw(c-565.02,-4491.56) Boot_sel.1@-533.17,-4523.4 ; Boot_sel.1@-528.93,-4545.54 ccw(c-550.53,-4567.14) -550.53,-4536.59 ccw(c-550.53,-4506.04) Boot_sel.1@-528.93,-4527.64 ; Boot_sel.1@-516.44,-4549.78 cw(c-548.28,-4581.62) -503.25,-4581.62 cw(c-458.22,-4581.62) Boot_sel.1@-490.06,-4549.78 ; Boot_sel.1@-512.2,-4545.54 cw(c-533.8,-4567.14) -503.25,-4567.14 cw(c-472.7,-4567.14) Boot_sel.1@-494.3,-4545.54 ; Boot_sel.1@-477.57,-4545.54 cw(c-455.97,-4567.14) -455.97,-4536.59 cw(c-455.97,-4506.04) Boot_sel.1@-477.57,-4527.64 ; Boot_sel.1@-473.33,-4549.78 cw(c-441.48,-4581.62) -441.48,-4536.59 cw(c-441.48,-4491.56) Boot_sel.1@-473.33,-4523.4 ; Boot_sel.1@-310.73,-4549.78 ccw(c-342.58,-4581.62) -342.58,-4536.59 ccw(c-342.58,-4491.56) Boot_sel.1@-310.73,-4523.4 ; Boot_sel.1@-306.49,-4545.54 ccw(c-328.09,-4567.14) -328.09,-4536.59 ccw(c-328.09,-4506.04) Boot_sel.1@-306.49,-4527.64 ; Boot_sel.1@-280.81,-4536.59 Boot_sel.1@-503.25,-4536.59 ; v1(-4818.35,-3811.59) -4818.35,-3950.54 -4746.3,-4022.59 U4.1@-4746.3,-4740.59 -4657.81,-4740.59 -4644.81,-4753.59 -4644.81,-5066.59 -4635.81,-5075.59 ; R59.1@-1853.27,-4975.59 -1853.27,-5180.13 -1830.81,-5202.59 -556.81,-5202.59 -503.25,-5149.03 Boot_sel.1@-503.25,-4536.59 ; -4834.86,-3811.59 ccw(c-4834.86,-3795.07) -4823.18,-3806.75 ccw(c-4834.86,-3795.07) -4818.35,-3795.07 ccw(c-4801.83,-3795.07) -4813.51,-3806.75 ccw(c-4801.83,-3795.07) -4801.83,-3811.59 ccw(c-4801.83,-3828.11) -4813.51,-3816.43 ccw(c-4801.83,-3828.11) -4818.35,-3828.11 ccw(c-4834.86,-3828.11) -4823.18,-3816.43 ccw(c-4834.86,-3828.11) -4834.86,-3811.59
  Top Layer w10: U8.4@-3383.52,-940.05 ccw(c-3393.47,-920.81) -3371.81,-920.81 ; U8.4@-3371.81,-962.72 -3371.81,-920.81 ; U8.4@-3360.1,-940.05 cw(c-3350.15,-920.81) -3371.81,-920.81 ; v1@-3250.42,-914.42 ccw(c-3258.69,-922.69) -3258.69,-911 ccw(c-3258.69,-899.31) v1@-3250.42,-907.58 ; v1(-3247,-911) -3362,-911 -3371.81,-920.81 ; R58.2@-1135.66,-1985.97 cw(c-1160.73,-2011.04) -1125.27,-2011.04 cw(c-1089.82,-2011.04) R58.2@-1114.89,-1985.97 ; R58.2@-1135.66,-1965.21 ccw(c-1160.73,-1940.14) -1125.27,-1940.14 ccw(c-1089.82,-1940.14) R58.2@-1114.89,-1965.21 ; v1@-1128.7,-1883.01 cw(c-1136.97,-1891.28) -1125.27,-1891.28 cw(c-1113.58,-1891.28) -1121.85,-1883.01 cw(c-1113.58,-1891.28) -1113.58,-1879.59 cw(c-1113.58,-1867.9) v1@-1121.85,-1876.17 ; U3.8@-923.61,-2272.59 ccw(c-948.68,-2297.66) -948.68,-2262.2 ccw(c-948.68,-2226.75) U3.8@-923.61,-2251.82 ; U3.8@-913.23,-2262.2 -1104.8,-2262.2 -1125.27,-2241.73 R58.2@-1125.27,-1975.59 v1(-1125.27,-1879.59) -491.59,-1879.59 -458,-1846 -458,-1129 -373,-1044 -373,-518 -397,-494 U2.9@-603.35,-494 ; v1(-697,-494) U2.9@-603.35,-494 ; v1@-693.58,-497.42 cw(c-685.31,-505.69) -685.31,-494 cw(c-685.31,-482.31) v1@-693.58,-490.58 ; U2.9@-652.99,-504.66 ccw(c-678.73,-530.4) -678.73,-494 ccw(c-678.73,-457.6) U2.9@-652.99,-483.34 ; U2.9@-614.02,-483.34 ccw(c-639.76,-457.6) -603.35,-457.6 ccw(c-566.95,-457.6) U2.9@-592.69,-483.34 ; U2.9@-553.72,-504.66 cw(c-527.97,-530.4) -527.97,-494 cw(c-527.97,-457.6) U2.9@-553.72,-483.34 ; U2.8@-534.88,-404.66 ccw(c-560.62,-430.4) -560.62,-394 ccw(c-560.62,-357.6) U2.8@-534.88,-383.34 ; U2.8@-485.24,-394 -585,-394 -603.35,-412.35 U2.9@-603.35,-494
  Bottom Layer w6: v1@-5103.65,-2264.84 cw(c-5115.33,-2276.52) -5098.81,-2276.52 cw(c-5082.29,-2276.52) v1@-5093.97,-2264.84 ; v1@-5103.65,-2255.16 ccw(c-5115.33,-2243.48) -5098.81,-2243.48 ccw(c-5082.29,-2243.48) v1@-5093.97,-2255.16 ; v1@-4979.57,-3149.83 cw(c-4991.25,-3138.15) -4991.25,-3154.67 cw(c-4991.25,-3171.19) -4979.57,-3159.51 cw(c-4991.25,-3171.19) -4974.73,-3171.19 cw(c-4958.21,-3171.19) v1@-4969.89,-3159.51 ; v1@-4823.18,-3816.43 ccw(c-4834.86,-3828.11) -4834.86,-3811.59 ccw(c-4834.86,-3795.07) v1@-4823.18,-3806.75 ; v1(-4818.35,-3811.59) -4958.65,-3811.59 -4974.73,-3795.51 v1(-4974.73,-3154.67) -5080.73,-3154.67 -5098.81,-3136.59 v1(-5098.81,-2260) -5098.81,-2138 -5080.81,-2120 v1(-4519.35,-2120) ; v1@-4524.18,-2124.84 ccw(c-4535.86,-2136.52) -4535.86,-2120 ccw(c-4535.86,-2103.48) v1@-4524.18,-2115.16 ; v1(-4506.81,-5155.59) v1(-3311.81,-5155.59) ; v1@-4501.97,-5160.43 cw(c-4490.29,-5172.11) -4490.29,-5155.59 cw(c-4490.29,-5139.07) v1@-4501.97,-5150.75 ; v1(-4362.13,-2643.13) -4331.13,-2643.13 -4322,-2634 v1(-4322,-2561.59) ; v1@-4357.29,-2647.96 cw(c-4345.61,-2659.65) -4345.61,-2643.13 cw(c-4345.61,-2626.61) v1@-4357.29,-2638.29 ; v1@-4326.84,-2566.43 cw(c-4338.52,-2578.11) -4322,-2578.11 cw(c-4305.48,-2578.11) v1@-4317.16,-2566.43 ; v1@-3799.65,-2723.75 ccw(c-3811.33,-2712.07) -3794.81,-2712.07 ccw(c-3778.29,-2712.07) v1@-3789.97,-2723.75 ; v1(-3794.81,-2728.59) -3794.81,-2696.59 -3782.81,-2684.59 v1(-3323.22,-2684.59) -3323.22,-2148.18 -3332.87,-2138.53 v1(-3367.75,-2138.53) ; v1(-3650.74,-1642.59) v1(-3430.74,-1642.59) ; v1@-3645.9,-1647.43 cw(c-3634.22,-1659.11) -3634.22,-1642.59 cw(c-3634.22,-1626.07) v1@-3645.9,-1637.75 ; v1@-3425.9,-1647.43 ccw(c-3414.22,-1659.11) -3430.74,-1659.11 ccw(c-3447.26,-1659.11) -3435.58,-1647.43 ccw(c-3447.26,-1659.11) -3447.26,-1642.59 ccw(c-3447.26,-1626.07) -3435.58,-1637.75 ccw(c-3447.26,-1626.07) -3430.74,-1626.07 ccw(c-3414.22,-1626.07) v1@-3425.9,-1637.75 ; v1@-3376.65,-1147.43 ccw(c-3388.33,-1159.11) -3388.33,-1142.59 ccw(c-3388.33,-1126.07) v1@-3376.65,-1137.75 ; v1@-3372.58,-2014.43 ccw(c-3384.26,-2026.11) -3384.26,-2009.59 ccw(c-3384.26,-1993.07) v1@-3372.58,-2004.75 ; v1(-3371.81,-1142.59) -3420.81,-1142.59 -3430.74,-1152.52 v1(-3430.74,-1642.59) ; v1(-3367.75,-2009.59) -3421.81,-2009.59 -3430.74,-2000.66 v1(-3430.74,-1642.59) ; v1@-3362.91,-2143.36 cw(c-3351.23,-2155.04) -3351.23,-2138.53 cw(c-3351.23,-2122.01) v1@-3362.91,-2133.69 ; v1@-3328.06,-3084.34 ccw(c-3339.74,-3072.66) -3323.22,-3072.66 ccw(c-3306.7,-3072.66) v1@-3318.38,-3084.34 ; v1@-3328.06,-2969.84 cw(c-3339.74,-2981.52) -3323.22,-2981.52 cw(c-3306.7,-2981.52) v1@-3318.38,-2969.84 ; v1@-3328.06,-2689.43 ccw(c-3339.74,-2701.11) -3339.74,-2684.59 ccw(c-3339.74,-2668.07) -3328.06,-2679.75 ccw(c-3339.74,-2668.07) -3323.22,-2668.07 ccw(c-3306.7,-2668.07) v1@-3318.38,-2679.75 ; v1(-3323.22,-3089.18) v1(-3323.22,-2965) ; v1@-3316.65,-5160.43 ccw(c-3328.33,-5172.11) -3328.33,-5155.59 ccw(c-3328.33,-5139.07) v1@-3316.65,-5150.75 ; v1(-2205.27,-1850.59) -1869.81,-1850.59 -1849.81,-1830.59 v1(-1849.81,-1628.59) ; v1@-2200.44,-1855.43 cw(c-2188.76,-1867.11) -2188.76,-1850.59 cw(c-2188.76,-1834.07) v1@-2200.44,-1845.75 ; v1@-1854.65,-1633.43 cw(c-1866.33,-1645.11) -1849.81,-1645.11 cw(c-1833.29,-1645.11) v1@-1844.97,-1633.43 ; v1@-1528.18,-1598.96 cw(c-1539.86,-1610.64) -1523.35,-1610.64 cw(c-1506.83,-1610.64) v1@-1518.51,-1598.96 ; v1(-1523.35,-1594.13) -1523.35,-1858.05 -1501.81,-1879.59 v1(-1125.27,-1879.59) ; v1@-1180.11,-4173.89 cw(c-1191.79,-4185.57) -1175.27,-4185.57 cw(c-1158.75,-4185.57) v1@-1170.44,-4173.89 ; v1(-1175.27,-4169.05) -1175.27,-4500.13 -1138.81,-4536.59 v1(-775,-4536.59) ; v1@-1130.11,-1884.43 ccw(c-1141.79,-1896.11) -1141.79,-1879.59 ccw(c-1141.79,-1863.07) v1@-1130.11,-1874.75 ; v1@-779.84,-4541.43 ccw(c-791.52,-4553.11) -791.52,-4536.59 ccw(c-791.52,-4520.07) v1@-779.84,-4531.75
  Bottom Layer w10: v1@-3250.42,-907.58 ccw(c-3258.69,-899.31) -3247,-899.31 ccw(c-3235.31,-899.31) v1@-3243.58,-907.58 ; v1(-3247,-911) -3247,-516 -3225,-494 v1(-697,-494) ; v1@-700.42,-497.42 ccw(c-708.69,-505.69) -708.69,-494 ccw(c-708.69,-482.31) v1@-700.42,-490.58
VDD12: C8.2 C9.2 U1.3 U1.29 U1.36 U1.50 | length 3288.7
  Top Layer w6: v1@-3982.65,-3093.43 cw(c-3994.33,-3105.11) -3977.81,-3105.11 cw(c-3961.29,-3105.11) v1@-3972.97,-3093.43 ; v1(-3977.81,-3088.59) -3977.81,-3247.59 -3956.42,-3268.98 U1.3@-3728.31,-3268.98 ; C9.2@-3662.54,-2687.39 cw(c-3691.02,-2715.87) -3650.74,-2715.87 cw(c-3610.46,-2715.87) C9.2@-3638.94,-2687.39 ; C9.2@-3662.54,-2663.79 ccw(c-3691.02,-2635.31) -3650.74,-2635.31 ccw(c-3610.46,-2635.31) C9.2@-3638.94,-2663.79 ; C8.2@-3662.54,-2567.39 cw(c-3691.02,-2595.87) -3650.74,-2595.87 cw(c-3610.46,-2595.87) C8.2@-3638.94,-2567.39 ; C9.2@-3658.3,-2683.15 cw(c-3676.54,-2701.39) -3650.74,-2701.39 cw(c-3624.94,-2701.39) C9.2@-3643.18,-2683.15 ; C9.2@-3658.3,-2668.03 ccw(c-3676.54,-2649.79) -3650.74,-2649.79 ccw(c-3624.94,-2649.79) C9.2@-3643.18,-2668.03 ; C8.2@-3658.3,-2563.15 cw(c-3676.54,-2581.39) -3650.74,-2581.39 cw(c-3624.94,-2581.39) C8.2@-3643.18,-2563.15 ; v1@-3655.58,-2734.82 ccw(c-3667.26,-2723.14) -3650.74,-2723.14 ccw(c-3634.22,-2723.14) v1@-3645.9,-2734.82 ; v1(-3650.74,-2739.66) C9.2@-3650.74,-2675.59 C8.2@-3650.74,-2555.59 ; U1.29@-3500.94,-3512.09 -3500.94,-3568.46 -3491.94,-3577.46 v1(-3350.81,-3577.46) ; v1@-3424.65,-3090.43 ccw(c-3436.33,-3102.11) -3436.33,-3085.59 ccw(c-3436.33,-3069.07) v1@-3424.65,-3080.75 ; v1(-3419.81,-3085.59) -3458.81,-3085.59 -3469.45,-3096.23 U1.50@-3469.45,-3199.09 -3469.45,-3234.95 -3458.81,-3245.59 -3458.81,-3414.59 -3446.94,-3426.46 U1.36@-3415.31,-3426.46 -3383.68,-3426.46 -3375.81,-3418.59 v1(-3350.81,-3418.59) ; v1@-3355.65,-3582.29 ccw(c-3367.33,-3593.98) -3367.33,-3577.46 ccw(c-3367.33,-3560.94) v1@-3355.65,-3572.62 ; v1@-3355.65,-3423.43 ccw(c-3367.33,-3435.11) -3367.33,-3418.59 ccw(c-3367.33,-3402.07) v1@-3355.65,-3413.75
  Bottom Layer w6: v1(-3977.81,-3088.59) -3755.81,-3088.59 -3742.81,-3075.59 -3742.81,-2751.59 -3730.88,-2739.66 v1(-3650.74,-2739.66) -3436.74,-2739.66 -3419.81,-2756.59 v1(-3419.81,-3085.59) ; v1@-3972.97,-3093.43 cw(c-3961.29,-3105.11) -3961.29,-3088.59 cw(c-3961.29,-3072.07) v1@-3972.97,-3083.75 ; v1@-3655.58,-2744.5 ccw(c-3667.26,-2756.18) -3667.26,-2739.66 ccw(c-3667.26,-2723.14) v1@-3655.58,-2734.82 ; v1@-3645.9,-2744.5 cw(c-3634.22,-2756.18) -3634.22,-2739.66 cw(c-3634.22,-2723.14) v1@-3645.9,-2734.82 ; v1@-3424.65,-3080.75 ccw(c-3436.33,-3069.07) -3419.81,-3069.07 ccw(c-3403.29,-3069.07) v1@-3414.97,-3080.75 ; v1@-3355.65,-3572.62 ccw(c-3367.33,-3560.94) -3350.81,-3560.94 ccw(c-3334.29,-3560.94) v1@-3345.97,-3572.62 ; v1@-3355.65,-3423.43 cw(c-3367.33,-3435.11) -3350.81,-3435.11 cw(c-3334.29,-3435.11) v1@-3345.97,-3423.43 ; v1(-3350.81,-3577.46) v1(-3350.81,-3418.59)
W5500_CLK: U1.64 U2.4 | length 5461
  Top Layer w6: v1@-3857.65,-2991.43 cw(c-3869.33,-3003.11) -3852.81,-3003.11 cw(c-3836.29,-3003.11) v1@-3847.97,-2991.43 ; v1(-3852.81,-2986.59) -3852.81,-3187.59 -3841.31,-3199.09 U1.64@-3689.92,-3199.09 ; v1@-1604.65,-935.75 ccw(c-1616.33,-924.07) -1599.81,-924.07 ccw(c-1583.29,-924.07) v1@-1594.97,-935.75 ; v1(-1599.81,-940.59) -1599.81,-609.59 -1585.22,-595 U2.4@-1277.87,-595 ; U2.4@-1328.93,-607.08 ccw(c-1358.08,-636.23) -1358.08,-595 ccw(c-1358.08,-553.77) U2.4@-1328.93,-582.92 ; U2.4@-1324.68,-602.83 ccw(c-1343.6,-621.75) -1343.6,-595 ccw(c-1343.6,-568.25) U2.4@-1324.68,-587.17
  Bottom Layer w6: v1@-3857.65,-2981.75 ccw(c-3869.33,-2970.07) -3852.81,-2970.07 ccw(c-3836.29,-2970.07) v1@-3847.97,-2981.75 ; v1(-3852.81,-2986.59) -3852.81,-2104.59 -3839.81,-2091.59 -3647.81,-2091.59 -3318.93,-2091.59 -3277.81,-2050.47 -3277.81,-1210.47 -3254.93,-1187.59 -2200.93,-1187.59 -2159.81,-1146.47 -2159.81,-952.59 -2147.81,-940.59 v1(-1599.81,-940.59) ; v1@-1604.65,-945.43 ccw(c-1616.33,-957.11) -1616.33,-940.59 ccw(c-1616.33,-924.07) v1@-1604.65,-935.75
W5500_CS: U1.22 U2.5 | length 5666.6
  Top Layer w6: U1.22@-3611.18,-3512.09 -3611.18,-3706.22 -3598.81,-3718.59 -2681.81,-3718.59 -2671.81,-3708.59 v1(-2671.81,-3637.59) ; v1@-2676.65,-3642.43 cw(c-2688.33,-3654.11) -2671.81,-3654.11 cw(c-2655.29,-3654.11) v1@-2666.97,-3642.43 ; v1@-1510.68,-1111.75 ccw(c-1522.36,-1100.07) -1505.84,-1100.07 ccw(c-1489.32,-1100.07) v1@-1501,-1111.75 ; v1(-1505.84,-1116.59) -1505.84,-708.62 -1492.22,-695 U2.5@-1395.98,-695 ; U2.5@-1447.04,-707.08 ccw(c-1476.19,-736.23) -1476.19,-695 ccw(c-1476.19,-653.77) U2.5@-1447.04,-682.92 ; U2.5@-1442.79,-702.83 ccw(c-1461.71,-721.75) -1461.71,-695 ccw(c-1461.71,-668.25) U2.5@-1442.79,-687.17
  Bottom Layer w6: v1@-2676.65,-3642.43 ccw(c-2688.33,-3654.11) -2688.33,-3637.59 ccw(c-2688.33,-3621.07) v1@-2676.65,-3632.75 ; v1(-2671.81,-3637.59) -2698.81,-3637.59 -2708.81,-3627.59 -2708.81,-3374.59 -2696.81,-3362.59 -1597.84,-3362.59 -1561.81,-3326.56 -1561.81,-1130.59 -1547.81,-1116.59 v1(-1505.84,-1116.59) ; v1@-1510.68,-1121.43 ccw(c-1522.36,-1133.11) -1522.36,-1116.59 ccw(c-1522.36,-1100.07) v1@-1510.68,-1111.75
W5500_INT: U1.4 U2.6 | length 5648.7
  Top Layer w6: v1@-4018.65,-2993.43 cw(c-4030.33,-3005.11) -4013.81,-3005.11 cw(c-3997.29,-3005.11) v1@-4008.97,-2993.43 ; v1(-4013.81,-2988.59) -4013.81,-3273.59 -4002.68,-3284.72 U1.4@-3728.31,-3284.72 ; v1(-1370.22,-795) U2.6@-1277.87,-795 ; v1@-1365.38,-799.84 cw(c-1353.7,-811.52) -1353.7,-795 cw(c-1353.7,-778.48) v1@-1365.38,-790.16 ; U2.6@-1328.93,-807.08 ccw(c-1358.08,-836.23) -1358.08,-795 ccw(c-1358.08,-753.77) U2.6@-1328.93,-782.92 ; U2.6@-1324.68,-802.83 ccw(c-1343.6,-821.75) -1343.6,-795 ccw(c-1343.6,-768.25) U2.6@-1324.68,-787.17
  Bottom Layer w6: v1@-4018.65,-2983.75 ccw(c-4030.33,-2972.07) -4013.81,-2972.07 ccw(c-3997.29,-2972.07) v1@-4008.97,-2983.75 ; v1(-4013.81,-2988.59) -4013.81,-2069.59 -3999.81,-2055.59 -3333.84,-2055.59 -3313.81,-2035.56 -3313.81,-1195.56 -3269.84,-1151.59 -2215.84,-1151.59 -2195.81,-1131.56 -2195.81,-810.59 -2180.22,-795 v1(-1370.22,-795) ; v1@-1375.06,-799.84 ccw(c-1386.74,-811.52) -1386.74,-795 ccw(c-1386.74,-778.48) v1@-1375.06,-790.16
W5500_MISO: U1.2 U2.12 | length 6245.9
  Top Layer w6: v1@-3941.65,-2991.43 cw(c-3953.33,-3003.11) -3936.81,-3003.11 cw(c-3920.29,-3003.11) v1@-3931.97,-2991.43 ; v1(-3936.81,-2986.59) -3936.81,-3240.59 -3924.17,-3253.23 U1.2@-3728.31,-3253.23 ; v1(-638.22,-794) U2.12@-485.24,-794 ; v1@-633.38,-798.84 cw(c-621.7,-810.52) -621.7,-794 cw(c-621.7,-777.48) v1@-633.38,-789.16 ; U2.12@-536.3,-806.08 ccw(c-565.45,-835.23) -565.45,-794 ccw(c-565.45,-752.77) U2.12@-536.3,-781.92 ; U2.12@-532.05,-801.83 ccw(c-550.97,-820.75) -550.97,-794 ccw(c-550.97,-767.25) U2.12@-532.05,-786.17
  Bottom Layer w6: v1@-3941.65,-2981.75 ccw(c-3953.33,-2970.07) -3936.81,-2970.07 ccw(c-3920.29,-2970.07) v1@-3931.97,-2981.75 ; v1(-3936.81,-2986.59) -3936.81,-2079.59 -3924.81,-2067.59 -3328.87,-2067.59 -3301.81,-2040.53 -3301.81,-1200.53 -3264.87,-1163.59 -2210.87,-1163.59 -2183.81,-1136.53 -2183.81,-863.59 -2166.81,-846.59 -648.81,-846.59 -638.22,-836 v1(-638.22,-794) ; v1@-643.06,-798.84 cw(c-654.74,-810.52) -638.22,-810.52 cw(c-621.7,-810.52) v1@-633.38,-798.84
W5500_MOSI: U1.1 U2.3 | length 5529.3
  Top Layer w6: v1@-3900.65,-2991.43 cw(c-3912.33,-3003.11) -3895.81,-3003.11 cw(c-3879.29,-3003.11) v1@-3890.97,-2991.43 ; v1(-3895.81,-2986.59) -3895.81,-3223.59 -3881.92,-3237.48 U1.1@-3728.31,-3237.48 ; v1@-1653.65,-901.75 ccw(c-1665.33,-890.07) -1648.81,-890.07 ccw(c-1632.29,-890.07) v1@-1643.97,-901.75 ; v1(-1648.81,-906.59) -1648.81,-513.59 -1630.22,-495 U2.3@-1395.98,-495 ; U2.3@-1447.04,-507.08 ccw(c-1476.19,-536.23) -1476.19,-495 ccw(c-1476.19,-453.77) U2.3@-1447.04,-482.92 ; U2.3@-1442.79,-502.83 ccw(c-1461.71,-521.75) -1461.71,-495 ccw(c-1461.71,-468.25) U2.3@-1442.79,-487.17
  Bottom Layer w6: v1@-3900.65,-2981.75 ccw(c-3912.33,-2970.07) -3895.81,-2970.07 ccw(c-3879.29,-2970.07) v1@-3890.97,-2981.75 ; v1(-3895.81,-2986.59) -3895.81,-2680.59 -3895.81,-2094.59 -3880.81,-2079.59 -3650.81,-2079.59 -3367.81,-2079.59 -3323.9,-2079.59 -3289.81,-2045.5 -3289.81,-1205.5 -3259.9,-1175.59 -2876.81,-1175.59 -2205.9,-1175.59 -2171.81,-1141.5 -2171.81,-916.59 -2161.81,-906.59 v1(-1648.81,-906.59) ; v1@-1653.65,-911.43 ccw(c-1665.33,-923.11) -1665.33,-906.59 ccw(c-1665.33,-890.07) v1@-1653.65,-901.75
W5500_RSTN: U1.5 U2.11 | length 6517
  Top Layer w6: v1@-4055.65,-2992.43 cw(c-4067.33,-3004.11) -4050.81,-3004.11 cw(c-4034.29,-3004.11) v1@-4045.97,-2992.43 ; v1(-4050.81,-2987.59) -4050.81,-3288.59 -4038.93,-3300.47 U1.5@-3728.31,-3300.47 ; v1(-705.22,-694) U2.11@-603.35,-694 ; v1@-700.38,-698.84 cw(c-688.7,-710.52) -688.7,-694 cw(c-688.7,-677.48) v1@-700.38,-689.16 ; U2.11@-654.41,-706.08 ccw(c-683.56,-735.23) -683.56,-694 ccw(c-683.56,-652.77) U2.11@-654.41,-681.92 ; U2.11@-650.16,-701.83 ccw(c-669.08,-720.75) -669.08,-694 ccw(c-669.08,-667.25) U2.11@-650.16,-686.17
  Bottom Layer w6: v1@-4055.65,-2982.75 ccw(c-4067.33,-2971.07) -4050.81,-2971.07 ccw(c-4034.29,-2971.07) v1@-4045.97,-2982.75 ; v1(-4050.81,-2987.59) -4050.81,-2057.59 -4036.81,-2043.59 -3338.81,-2043.59 -3325.81,-2030.59 -3325.81,-1190.59 -3274.81,-1139.59 -2220.81,-1139.59 -2207.81,-1126.59 -2207.81,-710.59 -2191.22,-694 v1(-705.22,-694) ; v1@-710.06,-698.84 ccw(c-721.74,-710.52) -721.74,-694 ccw(c-721.74,-677.48) v1@-710.06,-689.16
WIFI_RST: U1.13 U3.1 | length 5565.5
  Top Layer w6: v1@-3946.54,-3444.64 ccw(c-3957.09,-3433.59) -3941.81,-3433.59 ; v1(-3941.81,-3449.59) -3941.81,-3433.59 ; v1@-3937.08,-3444.64 cw(c-3926.53,-3433.59) -3941.81,-3433.59 ; U1.13@-3728.31,-3426.46 -3934.68,-3426.46 -3941.81,-3433.59 ; v1(-1643.81,-2091.59) v1(-1508.81,-2091.59) ; v1@-1638.97,-2096.43 cw(c-1627.29,-2108.11) -1627.29,-2091.59 cw(c-1627.29,-2075.07) v1@-1638.97,-2086.75 ; v1@-1513.65,-2096.43 ccw(c-1525.33,-2108.11) -1525.33,-2091.59 ccw(c-1525.33,-2075.07) v1@-1513.65,-2086.75 ; U3.1@-373.84,-2226.78 ccw(c-402.33,-2198.3) -362.05,-2198.3 ccw(c-321.76,-2198.3) U3.1@-350.25,-2226.78 ; U3.1@-369.6,-2231.03 ccw(c-387.84,-2212.79) -362.05,-2212.79 ccw(c-336.25,-2212.79) U3.1@-354.49,-2231.03 ; v1@-366.88,-2096.43 cw(c-378.57,-2108.11) -362.05,-2108.11 cw(c-345.53,-2108.11) v1@-357.21,-2096.43 ; U3.1@-362.05,-2262.2 v1(-362.05,-2091.59)
  Bottom Layer w6: v1@-3946.65,-3444.75 ccw(c-3958.33,-3433.07) -3941.81,-3433.07 ccw(c-3925.29,-3433.07) v1@-3936.97,-3444.75 ; v1(-3941.81,-3449.59) -3941.81,-3388.59 -3928.81,-3375.59 -3284.81,-3375.59 -3234.81,-3325.59 -3234.81,-3226.44 -3219.96,-3211.59 -2793.81,-3211.59 -2739.81,-3157.59 -2739.81,-2105.59 -2725.81,-2091.59 v1(-1643.81,-2091.59) ; v1@-1648.65,-2096.43 ccw(c-1660.33,-2108.11) -1660.33,-2091.59 ccw(c-1660.33,-2075.07) v1@-1648.65,-2086.75 ; v1(-1508.81,-2091.59) v1(-362.05,-2091.59) ; v1@-1503.97,-2096.43 cw(c-1492.29,-2108.11) -1492.29,-2091.59 cw(c-1492.29,-2075.07) v1@-1503.97,-2086.75 ; v1@-366.88,-2096.43 ccw(c-378.57,-2108.11) -378.57,-2091.59 ccw(c-378.57,-2075.07) v1@-366.88,-2086.75
pads on no net: BT1.0 IIC.0 J1.0 J1.1 J1.8 J1.9 J2.None J3.None KEY.0 LCD.0 LED.0 MODIF.0 NFC.0 SWITCH_POWER.1 U1.39 U2.10 U3.2 U3.4 U3.5 U3.6 U3.7 U3.9 U3.10 U3.11 U3.12 U3.13 U3.14 U3.17 U3.18 U3.19 U3.20

## Polygon pours and split planes (outlines as drawn)
GND on Top Layer "Top Layer-No Net" (solid, pour order 1000): -5511.81,-5275.59 -5314.96,-5275.59 -5314.96,-5338.58 -196.85,-5338.58 -196.85,-5275.59 -0.31,-5275.59 0,-5275.28 0,-3796.56 -240.16,-3796.56 -240.16,-3422.54 0,-3422.54 0,-3165 -1240,-3165 -1240,-3033 -1240,-2005 -1156,-2005 0,-2005 0,-1751.97 -240.16,-1751.97 -240.16,-1377.95 0,-1377.95 0,0 -196.85,0 -196.85,62.99 -5314.96,62.99 -5314.96,0 -5511.5,0 -5511.81,-0.31 -5511.81,-5275.59
GND on Bottom Layer "Top Layer-No Net" (solid, pour order 1001): -5511.81,0 -5511.81,-5275.59 -5314.96,-5275.59 -5314.96,-5338.58 -196.85,-5338.58 -196.85,-5275.59 -196.54,-5275.28 0,-5275.28 0,-3796.56 -240.16,-3796.56 -240.16,-3422.54 0,-3422.54 0,-3167 -2,-3165 -264,-3165 -1240,-3165 -1240,-2005 -1221,-2005 -1220,-2006 0,-2006 0,-1751.97 -240.16,-1751.97 -240.16,-1377.95 0,-1377.95 0,0 -196.85,0 -196.85,62.99 -5314.96,62.99 -5314.96,0 -5315.27,-0.31 -5511.81,-0.31

## Keep-outs
Keep-Out Layer:
  lines w10: -5511.81,-4623.27 cw(c-5543.31,-4623.27) -5574.8,-4623.27 -5574.8,-4038.27 cw(c-5543.31,-4038.27) -5511.81,-4038.27 ; -5511.81,-3613.27 cw(c-5543.31,-3613.27) -5574.8,-3613.27 -5574.8,-3028.27 cw(c-5543.31,-3028.27) -5511.81,-3028.27 ; -5511.81,-2608.27 cw(c-5543.31,-2608.27) -5574.8,-2608.27 -5574.8,-2023.27 cw(c-5543.31,-2023.27) -5511.81,-2023.27 ; -5511.81,-1543.27 cw(c-5543.31,-1543.27) -5574.8,-1543.27 -5574.8,-958.27 cw(c-5543.31,-958.27) -5511.81,-958.27 ; -5511.81,-0.31 cw(c-5541.27,6.89) -5570.78,-0.11 -5570.78,62.99 -5826.77,62.99 -5826.77,-5338.58 -5574.8,-5338.58 -5574.8,-5275.59 cw(c-5543.31,-5275.59) -5511.81,-5275.59 ; -4.19,-3422.54 -240.16,-3422.54 -240.16,-3796.56 0,-3796.56 ; 0,-5275.28 cw(c29.46,-5282.48) 58.97,-5275.48 58.97,-5338.58 314.96,-5338.58 314.96,62.99 62.99,62.99 62.99,0 cw(c31.5,0) 0,0 ; 0,-4931 ccw(c31.5,-4931) 62.99,-4931 62.99,-4346 ccw(c31.5,-4346) 0,-4346 ; 0,-3422.54 0,-1751.97 -240.16,-1751.97 -240.16,-1377.95 0,-1377.95 0,0 ; 0,-2918.56 cw(c31.5,-2918.56) 62.99,-2918.56 62.99,-3796.56 cw(c31.5,-3796.56) 0,-3796.56 ; 0,-2093 ccw(c31.5,-2093) 62.99,-2093 62.99,-1278.32 ccw(c31.5,-1278.32) 0,-1278.32 ; 0,-776.32 ccw(c31.5,-776.32) 62.99,-776.32 62.99,-191.32 ccw(c31.5,-191.32) 0,-191.32 ; -5511.81,-5275.59 -5511.81,0 -5314.96,0 -5314.96,62.99 -196.85,62.99 -196.85,0 0,0 ; -5511.81,-5275.59 -5314.96,-5275.59 -5314.96,-5338.58 -196.85,-5338.58 -196.85,-5275.59 0,-5275.59 0,-3796.56

## Silkscreen, mask and mechanical layers (free items; w line width, h text height)
Top Overlay:
  circle w0: c-275.59,-275.59 r137.8
  circle w0: c-275.59,-5000 r137.8
  circle w0: c-5236.22,-5000 r137.8
  circle w0: c-5236.22,-275.59 r137.8
  lines w10: -1995.81,-643 -2744.81,-643 -2744.81,53 -1994.81,53 -1994.81,-642
  text "9V-12V" at -4584.81,-472 h30
  text "ON" at -5027.81,-878.59 h40
  text "+" at -4201.81,-978.59 h30 r270
  text "OFF" at -5035.81,-1072.59 h40
  text "有线网口" at -1012.81,-1119.59 h90
  text "+" at -3379.81,-1366.59 h30 r270
  text "+" at -5454,-1659 h40
  text "+" at -3500.81,-1719.59 h30
  text "+" at -5060.83,-2095.96 h30 r180
  text "无线WIFI" at -811.81,-2165.59 h90
  text "+" at -4033.94,-2214.18 h30
  text "GND" at -2254,-2267.59 h30
  text "TX" at -2438,-2270.59 h30
  text "VCC" at -2554,-2577.59 h30
  text "RX" at -2339,-2579.59 h30
  text "GND" at -840,-3403 h30
  text "CLK" at -940.81,-3749.59 h30
  text "AVDD" at -870,-3852 h30
  text "识别/升级仪" at -3001.81,-4035.59 h150
  text "GND" at -1326,-4035.59 h30
  text "GND" at -1967,-4065.59 h30
  text "5V" at -1679.81,-4067 h30
  text "V1.2" at -2747,-4192 h150
  text "RUN" at -449.81,-4226.59 h45
  text "20260608" at -2884,-4337 h150
  text "SWD" at -2633.81,-4528.59 h60
  text "GND" at -2784.81,-4637.59 h30
  text "BOOT" at -466.81,-4696.59 h45
  text "SWCLK" at -2400.81,-4736.59 h30
  text "SWDIO" at -2828.81,-4838.59 h30
  text "VCC" at -2350.81,-4940.59 h30
  text "RESET" at -1333.81,-5298.59 h60